# EAGLE board Nusbio Flash Extension (EAGLE 9.6.2)
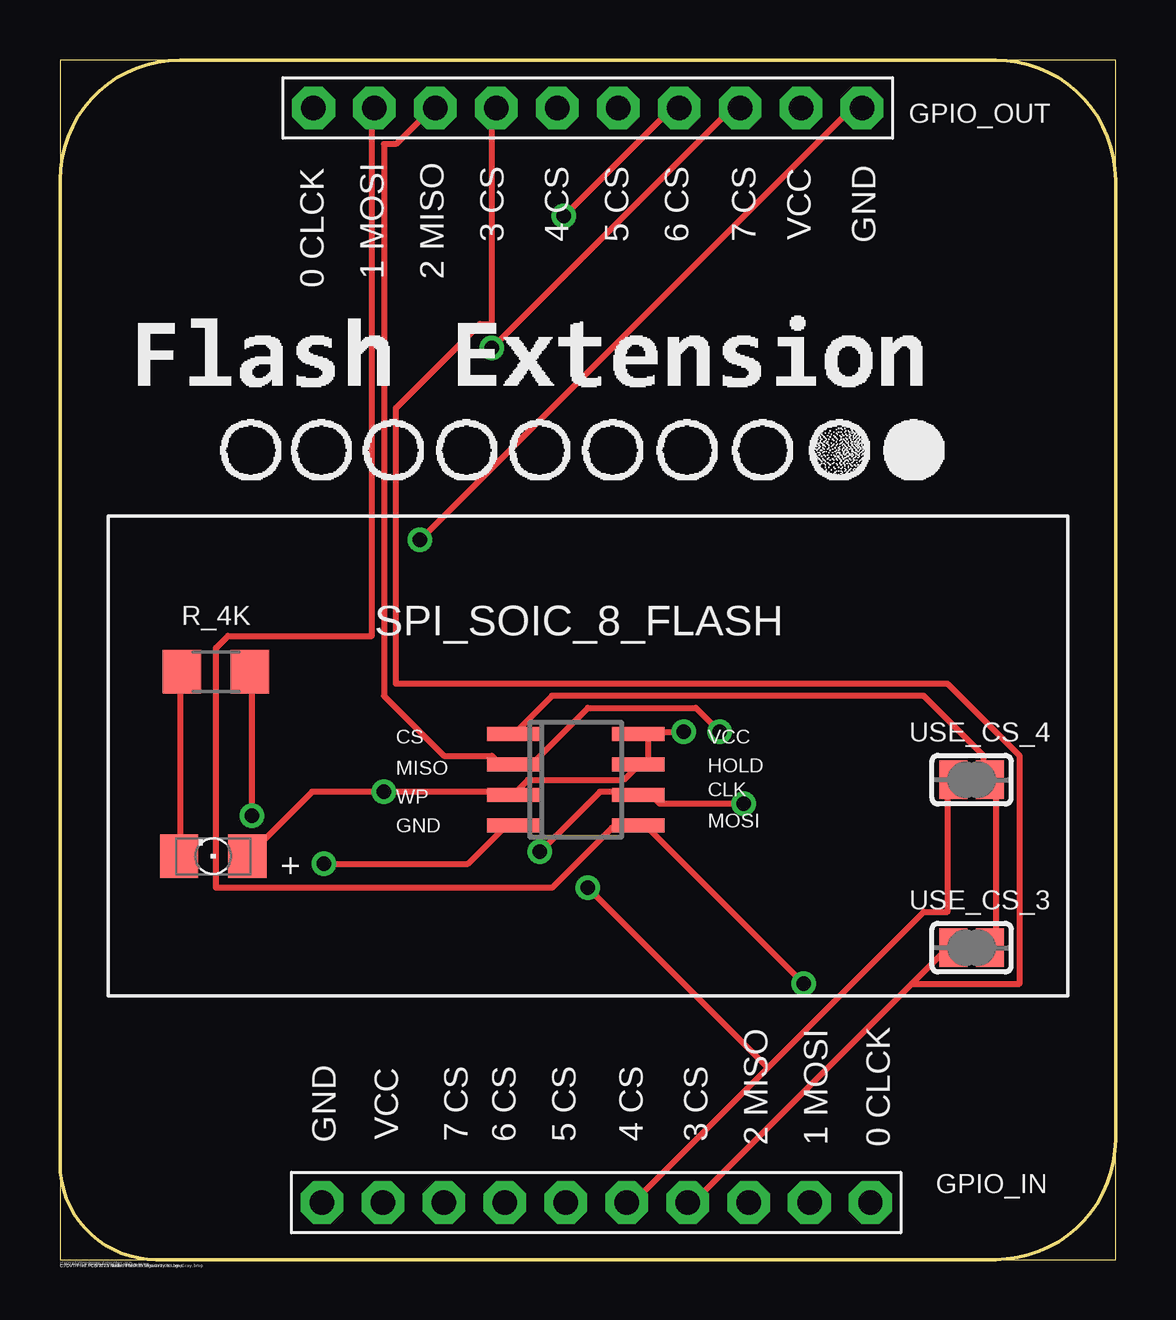
[diagram p0: board, top side]
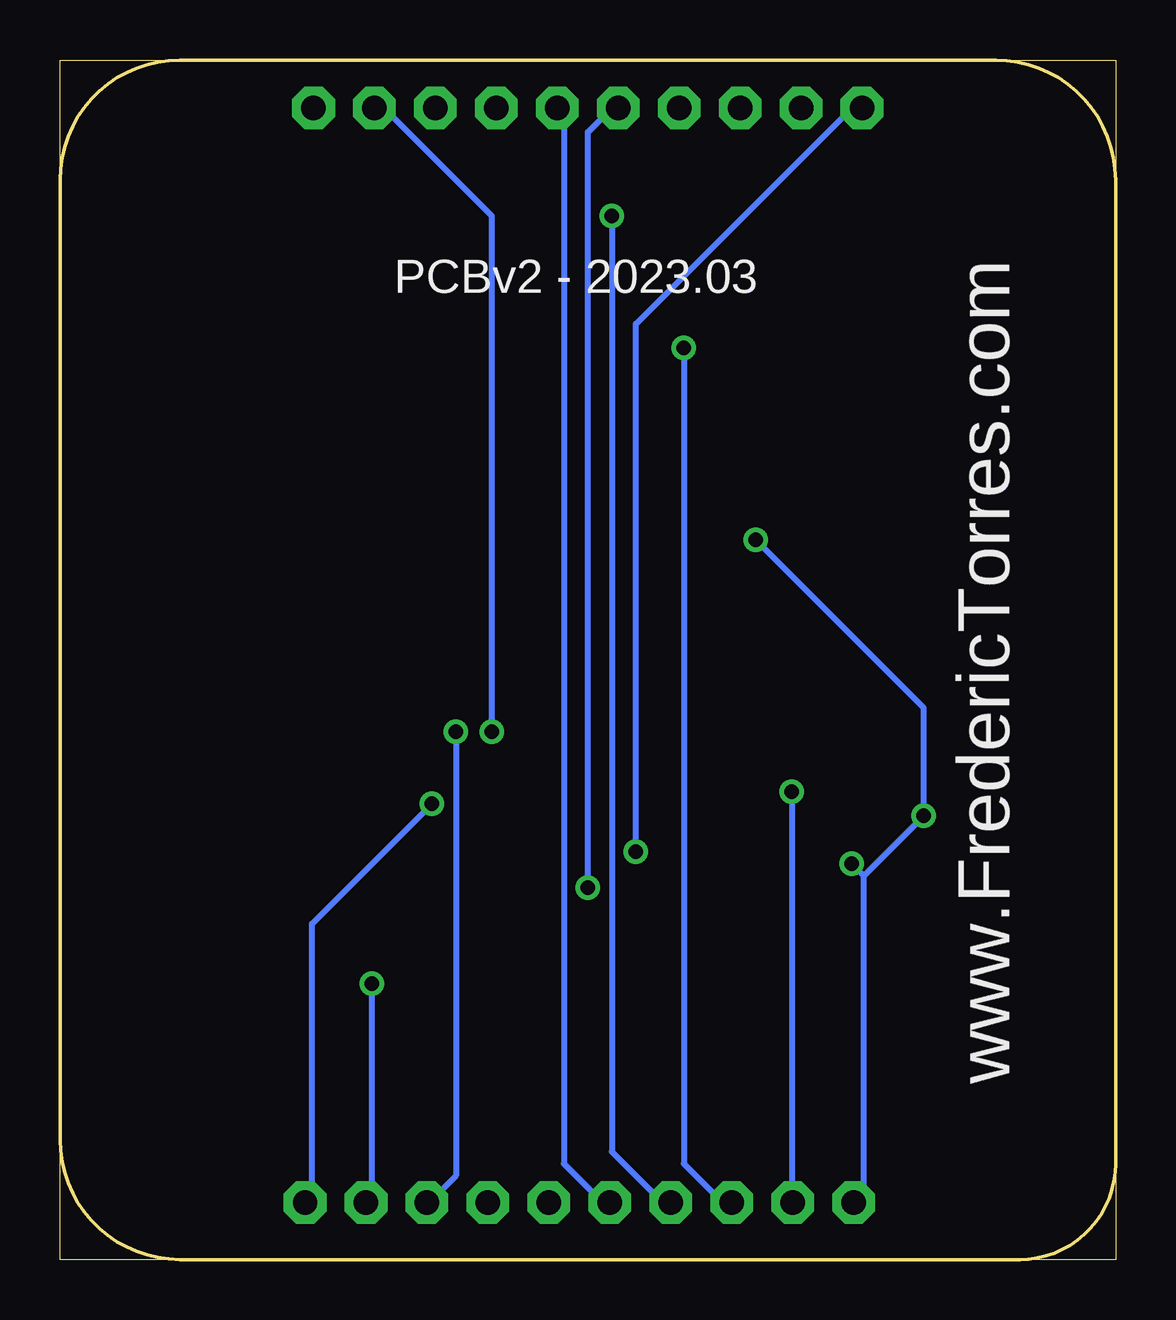
[diagram p1: board, bottom side, seen from below]

Size 44 x 50 mm. Coordinates in mm from the lower left corner, seen from the top.
Outline: 5,0 0,0 0,4
Outline: 39,0 44,0 44,5
Outline: 44,45 44,50 39,50
Outline: 6,50 0,50 0,45
Outline: 0,4 0,45
Outline: 0,45 arc-90 5,50 6,50
Outline: 6,50 39,50
Outline: 39,50 arc-90 44,45
Outline: 44,45 44,5
Outline: 44,5 arc-90 39,0
Outline: 39,0 5,0
Outline: 5,0 4,0 arc-90 0,4
Copper layers (1*16): Top 0.035mm / dielectric 1.5mm / Bottom 0.035mm
Design rules "default": minimum track width 10mil, minimum drill 24mil, track to track 8mil, track to pad 8mil, pad to pad 8mil, via to via 8mil, smd to smd 8mil, copper to edge 40mil, drill to drill 8mil, minimum pad ring 10mil, minimum via ring 8mil, stop-mask expansion 4mil, vias tented up to drill 0mil, thermal gap 10mil

## Footprints (pad centres in the part's own frame; a part is rotated, then mirrored left to right if it is on the bottom)
1X10-BIG = drill 1.016 pad 1.778 octagon: 1 -11.43,0; 2 -8.89,0; 3 -6.35,0; 4 -3.81,0; 5 -1.27,0; 6 1.27,0; 7 3.81,0; 8 6.35,0; 9 8.89,0; 10 11.43,0
1206 = smd 1.6 x 1.803: A -1.422,0; C 1.422,0
R1206 = smd 1.6 x 1.803: 1 -1.422,0; 2 1.422,0
SO-08 = smd 0.6 x 2.2: 1 -1.905,-2.6; 2 -0.635,-2.6; 3 0.635,-2.6; 4 1.905,-2.6; 5 1.905,2.6; 6 0.635,2.6; 7 -0.635,2.6; 8 -1.905,2.6
SOLDERJUMPER_REFLOW = smd 1.168 x 1.6: 1 -0.762,0; 2 0.762,0

## Placement (x,y rotation side)
GPIO_IN  PINHD-1X10  [1X10-BIG]  22.35,2.38 180 top
GPIO_OUT  PINHD-1X10  [1X10-BIG]  22,48 0 top
LED_POWER  [1206]  6.39,16.81 180 top
R_4K  [R1206]  6.5,24.5 180 top
SPI_SOIC_8_FLASH  25AA080SN  [SO-08]  21.5,20 270 top
USE_CS_3  [SOLDERJUMPER_REFLOW]  38,13 0 top
USE_CS_4  [SOLDERJUMPER_REFLOW]  38,20 0 top

## Library data of the parts
GPIO_IN GPIO_OUT LED_POWER R_4K = adafruit
SPI_SOIC_8_FLASH = microchip; MF: MICROCHIP; MPN: 25AA080/SN; OC_FARNELL: 1816072; OC_NEWARK: 92C7351
USE_CS_3 USE_CS_4 = microbuilder

## Nets
CS: SPI_SOIC_8_FLASH.1 USE_CS_3.2 USE_CS_4.2
CS_3: GPIO_IN.4 GPIO_OUT.4 USE_CS_3.1
CS_4: GPIO_IN.5 GPIO_OUT.5 USE_CS_4.1
GND: GPIO_IN.10 GPIO_OUT.10 R_4K.1 SPI_SOIC_8_FLASH.4
GPIO6: GPIO_IN.6 GPIO_OUT.6
GPIO7: GPIO_IN.7 GPIO_OUT.7
GPIO8: GPIO_IN.8 GPIO_OUT.8
MISO: GPIO_IN.3 GPIO_OUT.3 SPI_SOIC_8_FLASH.2
MOSI: GPIO_IN.2 GPIO_OUT.2 SPI_SOIC_8_FLASH.5
N$2: LED_POWER.C R_4K.2
SCK: GPIO_IN.1 GPIO_OUT.1 SPI_SOIC_8_FLASH.6
VCC: GPIO_IN.9 GPIO_OUT.9 LED_POWER.A SPI_SOIC_8_FLASH.3 SPI_SOIC_8_FLASH.7 SPI_SOIC_8_FLASH.8

## Tracks (layer width: path | path; a pad name or v marks a point on that pad's centre or on a via)
CS
  Top 0.254: USE_CS_3.2 39,13 39,20 USE_CS_4.2 38.5,20 38.5,21 36,23.5 20.5,23.5 19,22 SPI_SOIC_8_FLASH.1
CS_3
  Top 0.254: 35.5,11.5 26.5,2.5 GPIO_IN.4 | 35.5,11.5 37,13 USE_CS_3.1 | 35.5,11.5 40,11.5 40,21 37,24 14,24 14,35.5 17.5,39 18,39 18,48 GPIO_OUT.4
CS_4  (via drill 0.61)
  Top 0.254: 29.5,8 24,2.5 GPIO_IN.5 | 29.5,8 36,14.5 37,14.5 37,20 USE_CS_4.1 | 29.5,8 v22,15.5
  Bottom 0.254: v22,15.5 22,47 21,48 GPIO_OUT.5
GND  (via drill 0.61)
  Top 0.254: v8,18.5 8,24.5 R_4K.1 | v11,16.5 17,16.5 18.5,18 SPI_SOIC_8_FLASH.4 | v15,30 33,48 GPIO_OUT.10
  Bottom 0.254: 10.5,16 v8,18.5 8,23 v15,30 | 10.5,16 10.5,2.5 GPIO_IN.10 | 10.5,16 v11,16.5
GPIO6
  Bottom 0.254: GPIO_IN.6 21.5,2.5 23,4 23,48 GPIO_OUT.6
GPIO7  (via drill 0.61)
  Top 0.254: v21,43.5 25.5,48 GPIO_OUT.7
  Bottom 0.254: v21,43.5 21,4.5 19,2.5 GPIO_IN.7
GPIO8  (via drill 0.61)
  Top 0.254: v18,38 28,48 GPIO_OUT.8
  Bottom 0.254: v18,38 18,4 16.5,2.5 GPIO_IN.8
MISO  (via drill 0.61)
  Top 0.254: GPIO_OUT.3 15.5,48 14,46.5 13.5,46.5 13.5,23.5 16,21 18,21 18.5,20.5 SPI_SOIC_8_FLASH.2 19,20.5 19.5,20.5 22,23 26.5,23 v27.5,22
  Bottom 0.254: v27.5,22 27.5,3.5 28.5,2.5 GPIO_IN.3
MOSI  (via drill 0.61)
  Top 0.254: v31,11.5 24.5,18 SPI_SOIC_8_FLASH.5 24,18 23,18 20.5,15.5 6.5,15.5 6.5,25.5 7,26 13,26 13,48 GPIO_OUT.2
  Bottom 0.254: v31,11.5 31,2.5 GPIO_IN.2
N$2
  Top 0.254: LED_POWER.C 5,17 5,24.5 R_4K.2
SCK  (via drill 0.61)
  Top 0.254: v28.5,19 25,19 24.5,19.5 SPI_SOIC_8_FLASH.6 24,19.5 22.5,19.5 v20,17
  Bottom 0.254: v28.5,19 33.5,14 33.5,2.5 GPIO_IN.1 | v20,17 20,39 11,48 GPIO_OUT.1
VCC  (via drill 0.61)
  Top 0.254: 24.5,22 24.5,20.5 SPI_SOIC_8_FLASH.7 24,20.5 23.5,20 19.5,20 19,19.5 SPI_SOIC_8_FLASH.3 18.5,19.5 v13.5,19.5 10.5,19.5 8,17 LED_POWER.A | 24.5,22 v26,22 | 24.5,22 SPI_SOIC_8_FLASH.8
  Bottom 0.254: v13.5,19.5 13.5,2.5 GPIO_IN.9 | v26,22 26,43.5 30.5,48 GPIO_OUT.9

## Text on the board
tNames: 3 CS | 4 CS | 5 CS | 6 CS | 7 CS | VCC | GND | 0 CLCK | 1 MOSI | 2 MISO | CS | VCC | MISO | HOLD | WP | CLK | GND | MOSI | + | 2 MISO | 1 MOSI | 0 CLCK | GND | VCC | 7 CS | 6 CS | 5 CS | 4 CS | 3 CS | C:/DVT/Fred.PCB/2023/MadeInTheUSB.Logo.Gray.50.bmp | C:/DVT/Fred.PCB/2023/MadeInTheUSB.Logo.Gray.50.bmp | C:/DVT/Fred.PCB/2023/Nusbio Flash Extension/MadeInTheUSB.Logo.Gray.bmp | C:/DVT/Fred.PCB/2023/Nusbio Flash Extension/Title.Logo.Gray.bmp
bNames: PCBv2 - 2023.03 | www.FredericTorres.com